# EAGLE board MINI_MAST (EAGLE 9.5.1)
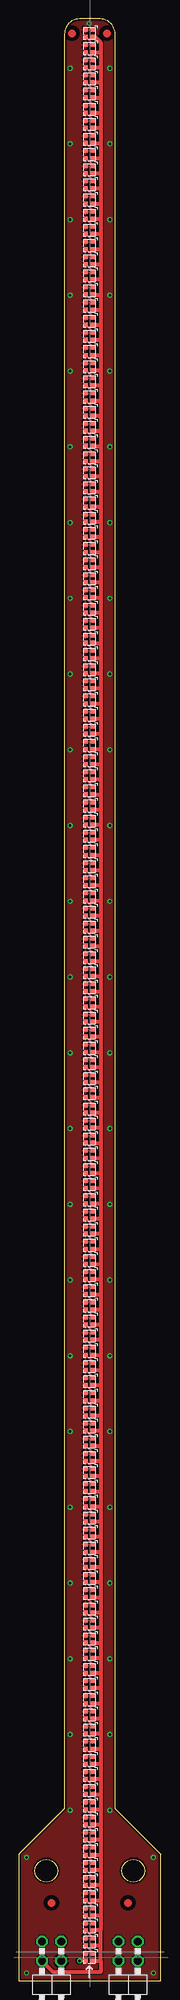
[diagram p0: board, top side]
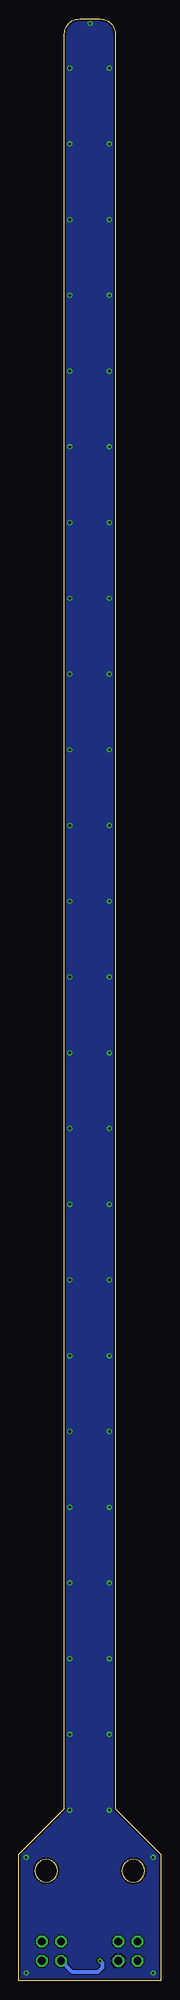
[diagram p1: board, bottom side, seen from below]

Size 18.7 x 259 mm. Coordinates in mm from the lower left corner, seen from the top.
Outline: 0,0 18.7,0 18.7,16.7 12.7,22.7 12.7,257 12.68,257.26 12.63,257.52 12.55,257.77 12.43,258 12.29,258.22 12.11,258.41 11.92,258.59 11.7,258.73 11.47,258.85 11.22,258.93 10.96,258.98 10.7,259 8,259 7.74,258.98 7.48,258.93 7.24,258.85 7,258.73 6.78,258.59 6.59,258.41 6.41,258.22 6.27,258 6.15,257.77 6.07,257.52 6.02,257.26 6,257 6,22.7 0,16.7 0,0
Outline: 3.6,16 3.99,15.95 4.35,15.8 4.66,15.56 4.9,15.25 5.05,14.89 5.1,14.5 5.05,14.11 4.9,13.75 4.66,13.44 4.35,13.2 3.99,13.05 3.6,13 3.21,13.05 2.85,13.2 2.54,13.44 2.3,13.75 2.15,14.11 2.1,14.5 2.15,14.89 2.3,15.25 2.54,15.56 2.85,15.8 3.21,15.95 3.6,16
Outline: 15.1,16 15.49,15.95 15.85,15.8 16.16,15.56 16.4,15.25 16.55,14.89 16.6,14.5 16.55,14.11 16.4,13.75 16.16,13.44 15.85,13.2 15.49,13.05 15.1,13 14.71,13.05 14.35,13.2 14.04,13.44 13.8,13.75 13.65,14.11 13.6,14.5 13.65,14.89 13.8,15.25 14.04,15.56 14.35,15.8 14.71,15.95 15.1,16
Copper layers (1*16): Top 0.035mm / dielectric 1.5mm / Bottom 0.035mm
Design rules "dirt_cheap_dirty_boards.v1.1": minimum track width 6mil, minimum drill 12mil, track to track 6mil, track to pad 6mil, pad to pad 6mil, via to via 6mil, smd to smd 0mil, copper to edge 10mil, drill to drill 10mil, minimum pad ring 10mil, minimum via ring 6mil, stop-mask expansion 2mil, vias tented up to drill 25mil, thermal gap 10mil

## Footprints (pad centres in the part's own frame; a part is rotated, then mirrored left to right if it is on the bottom)
2X02/90 = drill 1.016 octagon: 1 -1.27,-6.35; 2 -1.27,-3.81; 3 1.27,-6.35; 4 1.27,-3.81
1515 = smd 0.55 x 0.55: 5V 0.48,-0.48; DIN -0.48,-0.48; DOUT 0.48,0.48; GND -0.48,0.48

## Placement (x,y rotation side)
JP1  [2X02/90]  4.31,-1.2 180 top
JP2  [2X02/90]  14.41,-1.2 180 top
LED1  [1515]  9.3,3.1 0 top
LED2  [1515]  9.3,5.1 0 top
LED3  [1515]  9.3,7.1 0 top
LED4  [1515]  9.3,9.1 0 top
LED5  [1515]  9.3,11.1 0 top
LED6  [1515]  9.3,13.1 0 top
LED7  [1515]  9.3,15.1 0 top
LED8  [1515]  9.3,17.1 0 top
LED9  [1515]  9.3,19.1 0 top
LED10  [1515]  9.3,21.1 0 top
LED11  [1515]  9.3,23.1 0 top
LED12  [1515]  9.3,25.1 0 top
LED13  [1515]  9.3,27.1 0 top
LED14  [1515]  9.3,29.1 0 top
LED15  [1515]  9.3,31.1 0 top
LED16  [1515]  9.3,33.1 0 top
LED17  [1515]  9.3,35.1 0 top
LED18  [1515]  9.3,37.1 0 top
LED19  [1515]  9.3,39.1 0 top
LED20  [1515]  9.3,41.1 0 top
LED21  [1515]  9.3,43.1 0 top
LED22  [1515]  9.3,45.1 0 top
LED23  [1515]  9.3,47.1 0 top
LED24  [1515]  9.3,49.1 0 top
LED25  [1515]  9.3,51.1 0 top
LED26  [1515]  9.3,53.1 0 top
LED27  [1515]  9.3,55.1 0 top
LED28  [1515]  9.3,57.1 0 top
LED29  [1515]  9.3,59.1 0 top
LED30  [1515]  9.3,61.1 0 top
LED31  [1515]  9.3,63.1 0 top
LED32  [1515]  9.3,65.1 0 top
LED33  [1515]  9.3,67.1 0 top
LED34  [1515]  9.3,69.1 0 top
LED35  [1515]  9.3,71.1 0 top
LED36  [1515]  9.3,73.1 0 top
LED37  [1515]  9.3,75.1 0 top
LED38  [1515]  9.3,77.1 0 top
LED39  [1515]  9.3,79.1 0 top
LED40  [1515]  9.3,81.1 0 top
LED41  [1515]  9.3,83.1 0 top
LED42  [1515]  9.3,85.1 0 top
LED43  [1515]  9.3,87.1 0 top
LED44  [1515]  9.3,89.1 0 top
LED45  [1515]  9.3,91.1 0 top
LED46  [1515]  9.3,93.1 0 top
LED47  [1515]  9.3,95.1 0 top
LED48  [1515]  9.3,97.1 0 top
LED49  [1515]  9.3,99.1 0 top
LED50  [1515]  9.3,101.1 0 top
LED51  [1515]  9.3,103.1 0 top
LED52  [1515]  9.3,105.1 0 top
LED53  [1515]  9.3,107.1 0 top
LED54  [1515]  9.3,109.1 0 top
LED55  [1515]  9.3,111.1 0 top
LED56  [1515]  9.3,113.1 0 top
LED57  [1515]  9.3,115.1 0 top
LED58  [1515]  9.3,117.1 0 top
LED59  [1515]  9.3,119.1 0 top
LED60  [1515]  9.3,121.1 0 top
LED61  [1515]  9.3,123.1 0 top
LED62  [1515]  9.3,125.1 0 top
LED63  [1515]  9.3,127.1 0 top
LED64  [1515]  9.3,129.1 0 top
LED65  [1515]  9.3,131.1 0 top
LED66  [1515]  9.3,133.1 0 top
LED67  [1515]  9.3,135.1 0 top
LED68  [1515]  9.3,137.1 0 top
LED69  [1515]  9.3,139.1 0 top
LED70  [1515]  9.3,141.1 0 top
LED71  [1515]  9.3,143.1 0 top
LED72  [1515]  9.3,145.1 0 top
LED73  [1515]  9.3,147.1 0 top
LED74  [1515]  9.3,149.1 0 top
LED75  [1515]  9.3,151.1 0 top
LED76  [1515]  9.3,153.1 0 top
LED77  [1515]  9.3,155.1 0 top
LED78  [1515]  9.3,157.1 0 top
LED79  [1515]  9.3,159.1 0 top
LED80  [1515]  9.3,161.1 0 top
LED81  [1515]  9.3,163.1 0 top
LED82  [1515]  9.3,165.1 0 top
LED83  [1515]  9.3,167.1 0 top
LED84  [1515]  9.3,169.1 0 top
LED85  [1515]  9.3,171.1 0 top
LED86  [1515]  9.3,173.1 0 top
LED87  [1515]  9.3,175.1 0 top
LED88  [1515]  9.3,177.1 0 top
LED89  [1515]  9.3,179.1 0 top
LED90  [1515]  9.3,181.1 0 top
LED91  [1515]  9.3,183.1 0 top
LED92  [1515]  9.3,185.1 0 top
LED93  [1515]  9.3,187.1 0 top
LED94  [1515]  9.3,189.1 0 top
LED95  [1515]  9.3,191.1 0 top
LED96  [1515]  9.3,193.1 0 top
LED97  [1515]  9.3,195.1 0 top
LED98  [1515]  9.3,197.1 0 top
LED99  [1515]  9.3,199.1 0 top
LED100  [1515]  9.3,201.1 0 top
LED101  [1515]  9.3,203.1 0 top
LED102  [1515]  9.3,205.1 0 top
LED103  [1515]  9.3,207.1 0 top
LED104  [1515]  9.3,209.1 0 top
LED105  [1515]  9.3,211.1 0 top
LED106  [1515]  9.3,213.1 0 top
LED107  [1515]  9.3,215.1 0 top
LED108  [1515]  9.3,217.1 0 top
LED109  [1515]  9.3,219.1 0 top
LED110  [1515]  9.3,221.1 0 top
LED111  [1515]  9.3,223.1 0 top
LED112  [1515]  9.3,225.1 0 top
LED113  [1515]  9.3,227.1 0 top
LED114  [1515]  9.3,229.1 0 top
LED115  [1515]  9.3,231.1 0 top
LED116  [1515]  9.3,233.1 0 top
LED117  [1515]  9.3,235.1 0 top
LED118  [1515]  9.3,237.1 0 top
LED119  [1515]  9.3,239.1 0 top
LED120  [1515]  9.3,241.1 0 top
LED121  [1515]  9.3,243.1 0 top
LED122  [1515]  9.3,245.1 0 top
LED123  [1515]  9.3,247.1 0 top
LED124  [1515]  9.3,249.1 0 top
LED125  [1515]  9.3,251.1 0 top
LED126  [1515]  9.3,253.1 0 top
LED127  [1515]  9.3,255.1 0 top
LED128  [1515]  9.3,257.1 0 top
U$1  [CIRCLE-1MM-2R]  4.3,10.25 0 top
U$2  [CIRCLE-1MM-2R]  14.4,10.25 0 top
U$3  [CIRCLE-1MM-2R]  7,257.1 0 top
U$4  [CIRCLE-1MM-2R]  11.6,257.1 0 top

## Library data of the parts
JP1 JP2 = pinhead
LED1-LED128 = SK6805-1515
U$1-U$4 = fiducial

## Nets
5V: JP1.4 LED1.5V LED2.5V LED3.5V LED4.5V LED5.5V LED6.5V LED7.5V LED8.5V LED9.5V LED10.5V LED11.5V LED12.5V LED13.5V LED14.5V LED15.5V LED16.5V LED17.5V LED18.5V LED19.5V LED20.5V LED21.5V LED22.5V LED23.5V LED24.5V LED25.5V LED26.5V LED27.5V LED28.5V LED29.5V LED30.5V LED31.5V LED32.5V LED33.5V LED34.5V LED35.5V LED36.5V LED37.5V LED38.5V LED39.5V LED40.5V LED41.5V LED42.5V LED43.5V LED44.5V LED45.5V LED46.5V LED47.5V LED48.5V LED49.5V LED50.5V LED51.5V LED52.5V LED53.5V LED54.5V LED55.5V LED56.5V LED57.5V LED58.5V LED59.5V LED60.5V LED61.5V LED62.5V LED63.5V LED64.5V LED65.5V LED66.5V LED67.5V LED68.5V LED69.5V LED70.5V LED71.5V LED72.5V LED73.5V LED74.5V LED75.5V LED76.5V LED77.5V LED78.5V LED79.5V LED80.5V LED81.5V LED82.5V LED83.5V LED84.5V LED85.5V LED86.5V LED87.5V LED88.5V LED89.5V LED90.5V LED91.5V LED92.5V LED93.5V LED94.5V LED95.5V LED96.5V LED97.5V LED98.5V LED99.5V LED100.5V LED101.5V LED102.5V LED103.5V LED104.5V LED105.5V LED106.5V LED107.5V LED108.5V LED109.5V LED110.5V LED111.5V LED112.5V LED113.5V LED114.5V LED115.5V LED116.5V LED117.5V LED118.5V LED119.5V LED120.5V LED121.5V LED122.5V LED123.5V LED124.5V LED125.5V LED126.5V LED127.5V LED128.5V
DATA: JP2.4 LED1.DIN
DATA1: LED8.DOUT LED9.DIN
DATA2: LED24.DOUT LED25.DIN
DATA3: LED40.DOUT LED41.DIN
DATA4: LED56.DOUT LED57.DIN
DATA5: LED64.DOUT LED65.DIN
DATA6: LED72.DOUT LED73.DIN
DATA7: LED88.DOUT LED89.DIN
DATA8: LED104.DOUT LED105.DIN
DATA9: LED120.DOUT LED121.DIN
GND: JP1.2 LED1.GND LED2.GND LED3.GND LED4.GND LED5.GND LED6.GND LED7.GND LED8.GND LED9.GND LED10.GND LED11.GND LED12.GND LED13.GND LED14.GND LED15.GND LED16.GND LED17.GND LED18.GND LED19.GND LED20.GND LED21.GND LED22.GND LED23.GND LED24.GND LED25.GND LED26.GND LED27.GND LED28.GND LED29.GND LED30.GND LED31.GND LED32.GND LED33.GND LED34.GND LED35.GND LED36.GND LED37.GND LED38.GND LED39.GND LED40.GND LED41.GND LED42.GND LED43.GND LED44.GND LED45.GND LED46.GND LED47.GND LED48.GND LED49.GND LED50.GND LED51.GND LED52.GND LED53.GND LED54.GND LED55.GND LED56.GND LED57.GND LED58.GND LED59.GND LED60.GND LED61.GND LED62.GND LED63.GND LED64.GND LED65.GND LED66.GND LED67.GND LED68.GND LED69.GND LED70.GND LED71.GND LED72.GND LED73.GND LED74.GND LED75.GND LED76.GND LED77.GND LED78.GND LED79.GND LED80.GND LED81.GND LED82.GND LED83.GND LED84.GND LED85.GND LED86.GND LED87.GND LED88.GND LED89.GND LED90.GND LED91.GND LED92.GND LED93.GND LED94.GND LED95.GND LED96.GND LED97.GND LED98.GND LED99.GND LED100.GND LED101.GND LED102.GND LED103.GND LED104.GND LED105.GND LED106.GND LED107.GND LED108.GND LED109.GND LED110.GND LED111.GND LED112.GND LED113.GND LED114.GND LED115.GND LED116.GND LED117.GND LED118.GND LED119.GND LED120.GND LED121.GND LED122.GND LED123.GND LED124.GND LED125.GND LED126.GND LED127.GND LED128.GND
N$1: LED1.DOUT LED2.DIN
N$2: LED3.DOUT LED4.DIN
N$3: LED2.DOUT LED3.DIN
N$4: LED5.DOUT LED6.DIN
N$5: LED7.DOUT LED8.DIN
N$6: LED6.DOUT LED7.DIN
N$7: LED4.DOUT LED5.DIN
N$8: LED9.DOUT LED10.DIN
N$9: LED11.DOUT LED12.DIN
N$10: LED10.DOUT LED11.DIN
N$11: LED13.DOUT LED14.DIN
N$12: LED15.DOUT LED16.DIN
N$13: LED14.DOUT LED15.DIN
N$14: LED12.DOUT LED13.DIN
N$15: LED17.DOUT LED18.DIN
N$16: LED19.DOUT LED20.DIN
N$17: LED18.DOUT LED19.DIN
N$18: LED21.DOUT LED22.DIN
N$19: LED23.DOUT LED24.DIN
N$20: LED22.DOUT LED23.DIN
N$21: LED20.DOUT LED21.DIN
N$22: LED25.DOUT LED26.DIN
N$23: LED27.DOUT LED28.DIN
N$24: LED26.DOUT LED27.DIN
N$25: LED29.DOUT LED30.DIN
N$26: LED31.DOUT LED32.DIN
N$27: LED30.DOUT LED31.DIN
N$28: LED28.DOUT LED29.DIN
N$29: LED16.DOUT LED17.DIN
N$30: LED33.DOUT LED34.DIN
N$31: LED35.DOUT LED36.DIN
N$32: LED34.DOUT LED35.DIN
N$33: LED37.DOUT LED38.DIN
N$34: LED39.DOUT LED40.DIN
N$35: LED38.DOUT LED39.DIN
N$36: LED36.DOUT LED37.DIN
N$37: LED41.DOUT LED42.DIN
N$38: LED43.DOUT LED44.DIN
N$39: LED42.DOUT LED43.DIN
N$40: LED45.DOUT LED46.DIN
N$41: LED47.DOUT LED48.DIN
N$42: LED46.DOUT LED47.DIN
N$43: LED44.DOUT LED45.DIN
N$44: LED49.DOUT LED50.DIN
N$45: LED51.DOUT LED52.DIN
N$46: LED50.DOUT LED51.DIN
N$47: LED53.DOUT LED54.DIN
N$48: LED55.DOUT LED56.DIN
N$49: LED54.DOUT LED55.DIN
N$50: LED52.DOUT LED53.DIN
N$51: LED57.DOUT LED58.DIN
N$52: LED59.DOUT LED60.DIN
N$53: LED58.DOUT LED59.DIN
N$54: LED61.DOUT LED62.DIN
N$55: LED63.DOUT LED64.DIN
N$56: LED62.DOUT LED63.DIN
N$57: LED60.DOUT LED61.DIN
N$58: LED48.DOUT LED49.DIN
N$59: LED32.DOUT LED33.DIN
N$60: LED65.DOUT LED66.DIN
N$61: LED67.DOUT LED68.DIN
N$62: LED66.DOUT LED67.DIN
N$63: LED69.DOUT LED70.DIN
N$64: LED71.DOUT LED72.DIN
N$65: LED70.DOUT LED71.DIN
N$66: LED68.DOUT LED69.DIN
N$67: LED73.DOUT LED74.DIN
N$68: LED75.DOUT LED76.DIN
N$69: LED74.DOUT LED75.DIN
N$70: LED77.DOUT LED78.DIN
N$71: LED79.DOUT LED80.DIN
N$72: LED78.DOUT LED79.DIN
N$73: LED76.DOUT LED77.DIN
N$74: LED81.DOUT LED82.DIN
N$75: LED83.DOUT LED84.DIN
N$76: LED82.DOUT LED83.DIN
N$77: LED85.DOUT LED86.DIN
N$78: LED87.DOUT LED88.DIN
N$79: LED86.DOUT LED87.DIN
N$80: LED84.DOUT LED85.DIN
N$81: LED89.DOUT LED90.DIN
N$82: LED91.DOUT LED92.DIN
N$83: LED90.DOUT LED91.DIN
N$84: LED93.DOUT LED94.DIN
N$85: LED95.DOUT LED96.DIN
N$86: LED94.DOUT LED95.DIN
N$87: LED92.DOUT LED93.DIN
N$88: LED80.DOUT LED81.DIN
N$89: LED97.DOUT LED98.DIN
N$90: LED99.DOUT LED100.DIN
N$91: LED98.DOUT LED99.DIN
N$92: LED101.DOUT LED102.DIN
N$93: LED103.DOUT LED104.DIN
N$94: LED102.DOUT LED103.DIN
N$95: LED100.DOUT LED101.DIN
N$96: LED105.DOUT LED106.DIN
N$97: LED107.DOUT LED108.DIN
N$98: LED106.DOUT LED107.DIN
N$99: LED109.DOUT LED110.DIN
N$100: LED111.DOUT LED112.DIN
N$101: LED110.DOUT LED111.DIN
N$102: LED108.DOUT LED109.DIN
N$103: LED113.DOUT LED114.DIN
N$104: LED115.DOUT LED116.DIN
N$105: LED114.DOUT LED115.DIN
N$106: LED117.DOUT LED118.DIN
N$107: LED119.DOUT LED120.DIN
N$108: LED118.DOUT LED119.DIN
N$109: LED116.DOUT LED117.DIN
N$110: LED121.DOUT LED122.DIN
N$111: LED123.DOUT LED124.DIN
N$112: LED122.DOUT LED123.DIN
N$113: LED125.DOUT LED126.DIN
N$114: LED127.DOUT LED128.DIN
N$115: LED126.DOUT LED127.DIN
N$116: LED124.DOUT LED125.DIN
N$117: LED112.DOUT LED113.DIN
N$118: LED96.DOUT LED97.DIN

## Tracks (layer width: path | path; a pad name or v marks a point on that pad's centre or on a via)
5V
  Top 0.5: 10.78,2.62 10.78,1.1 4.55,1.1 JP1.4 | LED1.5V 10.78,2.62 | 10.78,2.62 10.78,4.62 | 10.78,4.62 LED2.5V | 10.78,4.62 10.78,6.62 | 10.78,6.62 LED3.5V | LED4.5V 10.78,8.62 | 10.78,8.62 10.78,6.62 | LED5.5V 10.78,10.62 | 10.78,10.62 10.78,8.62 | LED6.5V 10.78,12.62 | 10.78,12.62 10.78,10.62 | LED7.5V 10.78,14.62 | 10.78,14.62 10.78,12.62 | LED8.5V 10.78,16.62 | 10.78,16.62 10.78,14.62 | LED9.5V 10.78,18.62 | 10.78,18.62 10.78,16.62 | LED10.5V 10.78,20.62 | 10.78,20.62 10.78,18.62 | LED11.5V 10.78,22.62 | 10.78,22.62 10.78,20.62 | LED12.5V 10.78,24.62 | 10.78,24.62 10.78,22.62 | LED13.5V 10.78,26.62 | 10.78,26.62 10.78,24.62 | LED14.5V 10.78,28.62 | 10.78,28.62 10.78,26.62 | LED15.5V 10.78,30.62 | 10.78,30.62 10.78,28.62 | LED16.5V 10.78,32.62 | 10.78,32.62 10.78,30.62 | LED17.5V 10.78,34.62 | 10.78,34.62 10.78,32.62 | LED18.5V 10.78,36.62 | 10.78,36.62 10.78,34.62 | LED19.5V 10.78,38.62 | 10.78,38.62 10.78,36.62 | LED20.5V 10.78,40.62 | 10.78,40.62 10.78,38.62 | LED21.5V 10.78,42.62 | 10.78,42.62 10.78,40.62 | LED22.5V 10.78,44.62 | 10.78,44.62 10.78,42.62 | LED23.5V 10.78,46.62 | 10.78,46.62 10.78,44.62 | LED24.5V 10.78,48.62 | 10.78,48.62 10.78,46.62 | LED25.5V 10.78,50.62 | 10.78,50.62 10.78,48.62 | LED26.5V 10.78,52.62 | 10.78,52.62 10.78,50.62 | LED27.5V 10.78,54.62 | 10.78,54.62 10.78,52.62 | LED28.5V 10.78,56.62 | 10.78,56.62 10.78,54.62 | LED29.5V 10.78,58.62 | 10.78,58.62 10.78,56.62 | LED30.5V 10.78,60.62 | 10.78,60.62 10.78,58.62 | LED31.5V 10.78,62.62 | 10.78,62.62 10.78,60.62 | LED32.5V 10.78,64.62 | 10.78,64.62 10.78,62.62 | LED33.5V 10.78,66.62 | 10.78,66.62 10.78,64.62 | LED34.5V 10.78,68.62 | 10.78,68.62 10.78,66.62 | LED35.5V 10.78,70.62 | 10.78,70.62 10.78,68.62 | LED36.5V 10.78,72.62
  Top 0.5: 10.78,72.62 10.78,70.62 | LED37.5V 10.78,74.62 | 10.78,74.62 10.78,72.62 | LED38.5V 10.78,76.62 | 10.78,76.62 10.78,74.62 | LED39.5V 10.78,78.62 | 10.78,78.62 10.78,76.62 | LED40.5V 10.78,80.62 | 10.78,80.62 10.78,78.62 | LED41.5V 10.78,82.62 | 10.78,82.62 10.78,80.62 | LED42.5V 10.78,84.62 | 10.78,84.62 10.78,82.62 | LED43.5V 10.78,86.62 | 10.78,86.62 10.78,84.62 | LED44.5V 10.78,88.62 | 10.78,88.62 10.78,86.62 | LED45.5V 10.78,90.62 | 10.78,90.62 10.78,88.62 | LED46.5V 10.78,92.62 | 10.78,92.62 10.78,90.62 | LED47.5V 10.78,94.62 | 10.78,94.62 10.78,92.62 | LED48.5V 10.78,96.62 | 10.78,96.62 10.78,94.62 | LED49.5V 10.78,98.62 | 10.78,98.62 10.78,96.62 | LED50.5V 10.78,100.62 | 10.78,100.62 10.78,98.62 | LED51.5V 10.78,102.62 | 10.78,102.62 10.78,100.62 | LED52.5V 10.78,104.62 | 10.78,104.62 10.78,102.62 | LED53.5V 10.78,106.62 | 10.78,106.62 10.78,104.62 | LED54.5V 10.78,108.62 | 10.78,108.62 10.78,106.62 | LED55.5V 10.78,110.62 | 10.78,110.62 10.78,108.62 | LED56.5V 10.78,112.62 | 10.78,112.62 10.78,110.62 | LED57.5V 10.78,114.62 | 10.78,114.62 10.78,112.62 | LED58.5V 10.78,116.62 | 10.78,116.62 10.78,114.62 | LED59.5V 10.78,118.62 | 10.78,118.62 10.78,116.62 | LED60.5V 10.78,120.62 | 10.78,120.62 10.78,118.62 | LED61.5V 10.78,122.62 | 10.78,122.62 10.78,120.62 | LED62.5V 10.78,124.62 | 10.78,124.62 10.78,122.62 | LED63.5V 10.78,126.62 | 10.78,126.62 10.78,124.62 | LED64.5V 10.78,128.62 | 10.78,128.62 10.78,126.62 | LED65.5V 10.78,130.62 | 10.78,130.62 10.78,128.62 | LED66.5V 10.78,132.62 | 10.78,132.62 10.78,130.62 | LED67.5V 10.78,134.62 | 10.78,134.62 10.78,132.62 | LED68.5V 10.78,136.62 | 10.78,136.62 10.78,134.62 | LED69.5V 10.78,138.62 | 10.78,138.62 10.78,136.62
  Top 0.5: LED70.5V 10.78,140.62 | 10.78,140.62 10.78,138.62 | LED71.5V 10.78,142.62 | 10.78,142.62 10.78,140.62 | LED72.5V 10.78,144.62 | 10.78,144.62 10.78,142.62 | LED73.5V 10.78,146.62 | 10.78,146.62 10.78,144.62 | LED74.5V 10.78,148.62 | 10.78,148.62 10.78,146.62 | LED75.5V 10.78,150.62 | 10.78,150.62 10.78,148.62 | LED76.5V 10.78,152.62 | 10.78,152.62 10.78,150.62 | LED77.5V 10.78,154.62 | 10.78,154.62 10.78,152.62 | LED78.5V 10.78,156.62 | 10.78,156.62 10.78,154.62 | LED79.5V 10.78,158.62 | 10.78,158.62 10.78,156.62 | LED80.5V 10.78,160.62 | 10.78,160.62 10.78,158.62 | LED81.5V 10.78,162.62 | 10.78,162.62 10.78,160.62 | LED82.5V 10.78,164.62 | 10.78,164.62 10.78,162.62 | LED83.5V 10.78,166.62 | 10.78,166.62 10.78,164.62 | LED84.5V 10.78,168.62 | 10.78,168.62 10.78,166.62 | LED85.5V 10.78,170.62 | 10.78,170.62 10.78,168.62 | LED86.5V 10.78,172.62 | 10.78,172.62 10.78,170.62 | LED87.5V 10.78,174.62 | 10.78,174.62 10.78,172.62 | LED88.5V 10.78,176.62 | 10.78,176.62 10.78,174.62 | LED89.5V 10.78,178.62 | 10.78,178.62 10.78,176.62 | LED90.5V 10.78,180.62 | 10.78,180.62 10.78,178.62 | LED91.5V 10.78,182.62 | 10.78,182.62 10.78,180.62 | LED92.5V 10.78,184.62 | 10.78,184.62 10.78,182.62 | LED93.5V 10.78,186.62 | 10.78,186.62 10.78,184.62 | LED94.5V 10.78,188.62 | 10.78,188.62 10.78,186.62 | LED95.5V 10.78,190.62 | 10.78,190.62 10.78,188.62 | LED96.5V 10.78,192.62 | 10.78,192.62 10.78,190.62 | LED97.5V 10.78,194.62 | 10.78,194.62 10.78,192.62 | LED98.5V 10.78,196.62 | 10.78,196.62 10.78,194.62 | LED99.5V 10.78,198.62 | 10.78,198.62 10.78,196.62 | LED100.5V 10.78,200.62 | 10.78,200.62 10.78,198.62 | LED101.5V 10.78,202.62 | 10.78,202.62 10.78,200.62 | LED102.5V 10.78,204.62 | 10.78,204.62 10.78,202.62
  Top 0.5: LED103.5V 10.78,206.62 | 10.78,206.62 10.78,204.62 | LED104.5V 10.78,208.62 | 10.78,208.62 10.78,206.62 | LED105.5V 10.78,210.62 | 10.78,210.62 10.78,208.62 | LED106.5V 10.78,212.62 | 10.78,212.62 10.78,210.62 | LED107.5V 10.78,214.62 | 10.78,214.62 10.78,212.62 | LED108.5V 10.78,216.62 | 10.78,216.62 10.78,214.62 | LED109.5V 10.78,218.62 | 10.78,218.62 10.78,216.62 | LED110.5V 10.78,220.62 | 10.78,220.62 10.78,218.62 | LED111.5V 10.78,222.62 | 10.78,222.62 10.78,220.62 | LED112.5V 10.78,224.62 | 10.78,224.62 10.78,222.62 | LED113.5V 10.78,226.62 | 10.78,226.62 10.78,224.62 | LED114.5V 10.78,228.62 | 10.78,228.62 10.78,226.62 | LED115.5V 10.78,230.62 | 10.78,230.62 10.78,228.62 | LED116.5V 10.78,232.62 | 10.78,232.62 10.78,230.62 | LED117.5V 10.78,234.62 | 10.78,234.62 10.78,232.62 | LED118.5V 10.78,236.62 | 10.78,236.62 10.78,234.62 | LED119.5V 10.78,238.62 | 10.78,238.62 10.78,236.62 | LED120.5V 10.78,240.62 | 10.78,240.62 10.78,238.62 | LED121.5V 10.78,242.62 | 10.78,242.62 10.78,240.62 | LED122.5V 10.78,244.62 | 10.78,244.62 10.78,242.62 | LED123.5V 10.78,246.62 | 10.78,246.62 10.78,244.62 | LED124.5V 10.78,248.62 | 10.78,248.62 10.78,246.62 | LED125.5V 10.78,250.62 | 10.78,250.62 10.78,248.62 | LED126.5V 10.78,252.62 | 10.78,252.62 10.78,250.62 | LED127.5V 10.78,254.62 | 10.78,254.62 10.78,252.62 | LED128.5V 10.08,256.62 10.78,255.92 10.78,254.62
DATA  (via drill 0.35)
  Top 0.2: LED1.DIN 8.8,2.6
  Top 0.5: 8.8,2.6 v8,2.6
  Bottom 0.5: v8,2.6 7.7,2.3 7.7,1.7 8.3,1.1 11.63,1.1 JP2.4
DATA1
  Top 0.2: LED9.DIN 9.78,17.66 LED8.DOUT
DATA2
  Top 0.2: LED25.DIN 9.78,49.66 LED24.DOUT
DATA3
  Top 0.2: LED41.DIN 9.78,81.66 LED40.DOUT
DATA4
  Top 0.2: LED57.DIN 9.78,113.66 LED56.DOUT
DATA5
  Top 0.2: LED65.DIN 9.78,129.66 LED64.DOUT
DATA6
  Top 0.2: LED73.DIN 9.78,145.66 LED72.DOUT
DATA7
  Top 0.2: LED89.DIN 9.78,177.66 LED88.DOUT
DATA8
  Top 0.2: LED105.DIN 9.78,209.66 LED104.DOUT
DATA9
  Top 0.2: LED121.DIN 9.78,241.66 LED120.DOUT
GND  (via drill 0.35)
  other vias: 9.3,258.4 6.75,22.5 6.75,32.5 6.75,42.5 6.75,52.5 6.75,62.5 6.75,72.5 6.75,82.5 6.75,92.5 6.75,102.5 6.75,112.5 6.75,122.5 6.75,132.5 6.75,142.5 6.75,152.5 6.75,162.5 6.75,172.5 6.75,182.5 6.75,192.5 6.75,202.5 6.75,212.5 6.75,222.5 6.75,232.5 6.75,242.5 6.75,252.5 12,22.5 12,32.5 12,42.5 12,52.5 12,62.5 12,72.5 12,82.5 12,92.5 12,102.5 12,112.5 12,122.5 12,132.5 12,142.5 12,152.5 12,162.5 12,172.5 12,182.5 12,192.5 12,202.5 12,212.5 12,222.5 12,232.5 12,242.5 12,252.5 1,16.25 17.75,16.25 1,1 17.75,1
  pour Top: -0.5,-0.5 -0.5,17 5.5,23 5.5,258 7,259.5 11.5,259.5 13,258 13,23 19,17 19,-0.5
  pour Bottom: -0.5,-0.5 -0.5,17 5.5,23 5.5,258 7,259.5 11.5,259.5 13,258 13,23 19,17 19,-0.5
N$1
  Top 0.2: LED2.DIN 9.78,3.66 LED1.DOUT
N$2
  Top 0.2: LED4.DIN 9.78,7.66 LED3.DOUT
N$3
  Top 0.2: LED3.DIN 9.78,5.66 LED2.DOUT
N$4
  Top 0.2: LED6.DIN 9.78,11.66 LED5.DOUT
N$5
  Top 0.2: LED8.DIN 9.78,15.66 LED7.DOUT
N$6
  Top 0.2: LED7.DIN 9.78,13.66 LED6.DOUT
N$7
  Top 0.2: LED5.DIN 9.78,9.66 LED4.DOUT
N$8
  Top 0.2: LED10.DIN 9.78,19.66 LED9.DOUT
N$9
  Top 0.2: LED12.DIN 9.78,23.66 LED11.DOUT
N$10
  Top 0.2: LED11.DIN 9.78,21.66 LED10.DOUT
N$11
  Top 0.2: LED14.DIN 9.78,27.66 LED13.DOUT
N$12
  Top 0.2: LED16.DIN 9.78,31.66 LED15.DOUT
N$13
  Top 0.2: LED15.DIN 9.78,29.66 LED14.DOUT
N$14
  Top 0.2: LED13.DIN 9.78,25.66 LED12.DOUT
N$15
  Top 0.2: LED18.DIN 9.78,35.66 LED17.DOUT
N$16
  Top 0.2: LED20.DIN 9.78,39.66 LED19.DOUT
N$17
  Top 0.2: LED19.DIN 9.78,37.66 LED18.DOUT
N$18
  Top 0.2: LED22.DIN 9.78,43.66 LED21.DOUT
N$19
  Top 0.2: LED24.DIN 9.78,47.66 LED23.DOUT
N$20
  Top 0.2: LED23.DIN 9.78,45.66 LED22.DOUT
N$21
  Top 0.2: LED21.DIN 9.78,41.66 LED20.DOUT
N$22
  Top 0.2: LED26.DIN 9.78,51.66 LED25.DOUT
N$23
  Top 0.2: LED28.DIN 9.78,55.66 LED27.DOUT
N$24
  Top 0.2: LED27.DIN 9.78,53.66 LED26.DOUT
N$25
  Top 0.2: LED30.DIN 9.78,59.66 LED29.DOUT
N$26
  Top 0.2: LED32.DIN 9.78,63.66 LED31.DOUT
N$27
  Top 0.2: LED31.DIN 9.78,61.66 LED30.DOUT
N$28
  Top 0.2: LED29.DIN 9.78,57.66 LED28.DOUT
N$29
  Top 0.2: LED17.DIN 9.78,33.66 LED16.DOUT
N$30
  Top 0.2: LED34.DIN 9.78,67.66 LED33.DOUT
N$31
  Top 0.2: LED36.DIN 9.78,71.66 LED35.DOUT
N$32
  Top 0.2: LED35.DIN 9.78,69.66 LED34.DOUT
N$33
  Top 0.2: LED38.DIN 9.78,75.66 LED37.DOUT
N$34
  Top 0.2: LED40.DIN 9.78,79.66 LED39.DOUT
N$35
  Top 0.2: LED39.DIN 9.78,77.66 LED38.DOUT
N$36
  Top 0.2: LED37.DIN 9.78,73.66 LED36.DOUT
N$37
  Top 0.2: LED42.DIN 9.78,83.66 LED41.DOUT
N$38
  Top 0.2: LED44.DIN 9.78,87.66 LED43.DOUT
N$39
  Top 0.2: LED43.DIN 9.78,85.66 LED42.DOUT
N$40
  Top 0.2: LED46.DIN 9.78,91.66 LED45.DOUT
N$41
  Top 0.2: LED48.DIN 9.78,95.66 LED47.DOUT
N$42
  Top 0.2: LED47.DIN 9.78,93.66 LED46.DOUT
N$43
  Top 0.2: LED45.DIN 9.78,89.66 LED44.DOUT
N$44
  Top 0.2: LED50.DIN 9.78,99.66 LED49.DOUT
N$45
  Top 0.2: LED52.DIN 9.78,103.66 LED51.DOUT
N$46
  Top 0.2: LED51.DIN 9.78,101.66 LED50.DOUT
N$47
  Top 0.2: LED54.DIN 9.78,107.66 LED53.DOUT
N$48
  Top 0.2: LED56.DIN 9.78,111.66 LED55.DOUT
N$49
  Top 0.2: LED55.DIN 9.78,109.66 LED54.DOUT
N$50
  Top 0.2: LED53.DIN 9.78,105.66 LED52.DOUT
N$51
  Top 0.2: LED58.DIN 9.78,115.66 LED57.DOUT
N$52
  Top 0.2: LED60.DIN 9.78,119.66 LED59.DOUT
N$53
  Top 0.2: LED59.DIN 9.78,117.66 LED58.DOUT
N$54
  Top 0.2: LED62.DIN 9.78,123.66 LED61.DOUT
N$55
  Top 0.2: LED64.DIN 9.78,127.66 LED63.DOUT
N$56
  Top 0.2: LED63.DIN 9.78,125.66 LED62.DOUT
N$57
  Top 0.2: LED61.DIN 9.78,121.66 LED60.DOUT
N$58
  Top 0.2: LED49.DIN 9.78,97.66 LED48.DOUT
N$59
  Top 0.2: LED33.DIN 9.78,65.66 LED32.DOUT
N$60
  Top 0.2: LED66.DIN 9.78,131.66 LED65.DOUT
N$61
  Top 0.2: LED68.DIN 9.78,135.66 LED67.DOUT
N$62
  Top 0.2: LED67.DIN 9.78,133.66 LED66.DOUT
N$63
  Top 0.2: LED70.DIN 9.78,139.66 LED69.DOUT
N$64
  Top 0.2: LED72.DIN 9.78,143.66 LED71.DOUT
N$65
  Top 0.2: LED71.DIN 9.78,141.66 LED70.DOUT
N$66
  Top 0.2: LED69.DIN 9.78,137.66 LED68.DOUT
N$67
  Top 0.2: LED74.DIN 9.78,147.66 LED73.DOUT
N$68
  Top 0.2: LED76.DIN 9.78,151.66 LED75.DOUT
N$69
  Top 0.2: LED75.DIN 9.78,149.66 LED74.DOUT
N$70
  Top 0.2: LED78.DIN 9.78,155.66 LED77.DOUT
N$71
  Top 0.2: LED80.DIN 9.78,159.66 LED79.DOUT
N$72
  Top 0.2: LED79.DIN 9.78,157.66 LED78.DOUT
N$73
  Top 0.2: LED77.DIN 9.78,153.66 LED76.DOUT
N$74
  Top 0.2: LED82.DIN 9.78,163.66 LED81.DOUT
N$75
  Top 0.2: LED84.DIN 9.78,167.66 LED83.DOUT
N$76
  Top 0.2: LED83.DIN 9.78,165.66 LED82.DOUT
N$77
  Top 0.2: LED86.DIN 9.78,171.66 LED85.DOUT
N$78
  Top 0.2: LED88.DIN 9.78,175.66 LED87.DOUT
N$79
  Top 0.2: LED87.DIN 9.78,173.66 LED86.DOUT
N$80
  Top 0.2: LED85.DIN 9.78,169.66 LED84.DOUT
N$81
  Top 0.2: LED90.DIN 9.78,179.66 LED89.DOUT
N$82
  Top 0.2: LED92.DIN 9.78,183.66 LED91.DOUT
N$83
  Top 0.2: LED91.DIN 9.78,181.66 LED90.DOUT
N$84
  Top 0.2: LED94.DIN 9.78,187.66 LED93.DOUT
N$85
  Top 0.2: LED96.DIN 9.78,191.66 LED95.DOUT
N$86
  Top 0.2: LED95.DIN 9.78,189.66 LED94.DOUT
N$87
  Top 0.2: LED93.DIN 9.78,185.66 LED92.DOUT
N$88
  Top 0.2: LED81.DIN 9.78,161.66 LED80.DOUT
N$89
  Top 0.2: LED98.DIN 9.78,195.66 LED97.DOUT
N$90
  Top 0.2: LED100.DIN 9.78,199.66 LED99.DOUT
N$91
  Top 0.2: LED99.DIN 9.78,197.66 LED98.DOUT
N$92
  Top 0.2: LED102.DIN 9.78,203.66 LED101.DOUT
N$93
  Top 0.2: LED104.DIN 9.78,207.66 LED103.DOUT
N$94
  Top 0.2: LED103.DIN 9.78,205.66 LED102.DOUT
N$95
  Top 0.2: LED101.DIN 9.78,201.66 LED100.DOUT
N$96
  Top 0.2: LED106.DIN 9.78,211.66 LED105.DOUT
N$97
  Top 0.2: LED108.DIN 9.78,215.66 LED107.DOUT
N$98
  Top 0.2: LED107.DIN 9.78,213.66 LED106.DOUT
N$99
  Top 0.2: LED110.DIN 9.78,219.66 LED109.DOUT
N$100
  Top 0.2: LED112.DIN 9.78,223.66 LED111.DOUT
N$101
  Top 0.2: LED111.DIN 9.78,221.66 LED110.DOUT
N$102
  Top 0.2: LED109.DIN 9.78,217.66 LED108.DOUT
N$103
  Top 0.2: LED114.DIN 9.78,227.66 LED113.DOUT
N$104
  Top 0.2: LED116.DIN 9.78,231.66 LED115.DOUT
N$105
  Top 0.2: LED115.DIN 9.78,229.66 LED114.DOUT
N$106
  Top 0.2: LED118.DIN 9.78,235.66 LED117.DOUT
N$107
  Top 0.2: LED120.DIN 9.78,239.66 LED119.DOUT
N$108
  Top 0.2: LED119.DIN 9.78,237.66 LED118.DOUT
N$109
  Top 0.2: LED117.DIN 9.78,233.66 LED116.DOUT
N$110
  Top 0.2: LED122.DIN 9.78,243.66 LED121.DOUT
N$111
  Top 0.2: LED124.DIN 9.78,247.66 LED123.DOUT
N$112
  Top 0.2: LED123.DIN 9.78,245.66 LED122.DOUT
N$113
  Top 0.2: LED126.DIN 9.78,251.66 LED125.DOUT
N$114
  Top 0.2: LED128.DIN 9.78,255.66 LED127.DOUT
N$115
  Top 0.2: LED127.DIN 9.78,253.66 LED126.DOUT
N$116
  Top 0.2: LED125.DIN 9.78,249.66 LED124.DOUT
N$117
  Top 0.2: LED113.DIN 9.78,225.66 LED112.DOUT
N$118
  Top 0.2: LED97.DIN 9.78,193.66 LED96.DOUT

## Text on the board
tStop: MINI | MAST
bStop: | REV 1 | LIXIE LABS 2022 | MINI MAST